# Altium PCB e-puck3-camera-4L.PcbDoc
Units mm, origin at the board's own origin, x right, y up, seen from the top; angles counter-clockwise.
Board outline 8 x 65 mm, 4 copper layers (Top Layer, INternal layer 1, INternal layer 2, Bottom Layer), stack 0.381 mm thick; 8 components, 29 nets, 119 pads, 90 vias.
Unrouted connection lines stored in the file: 1.
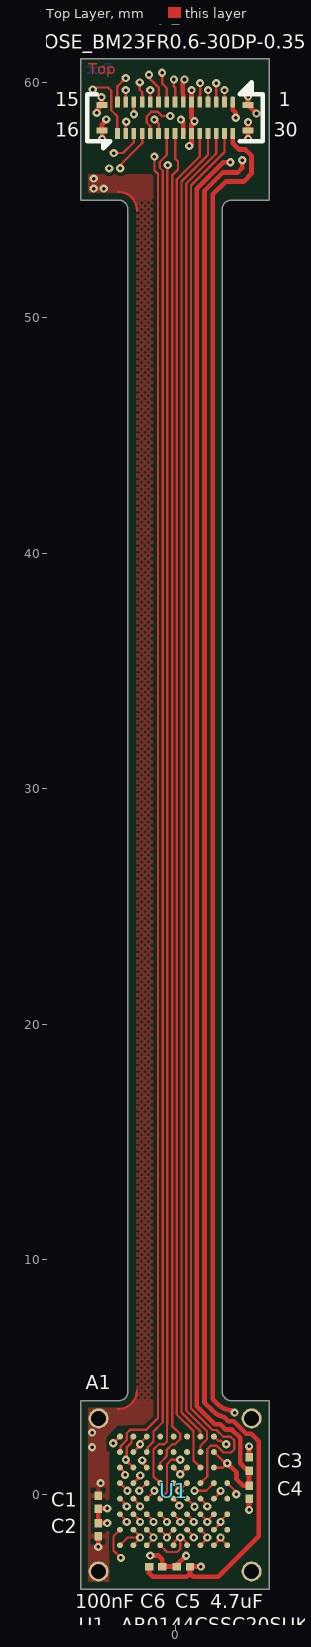
[diagram p0: Top Layer view]
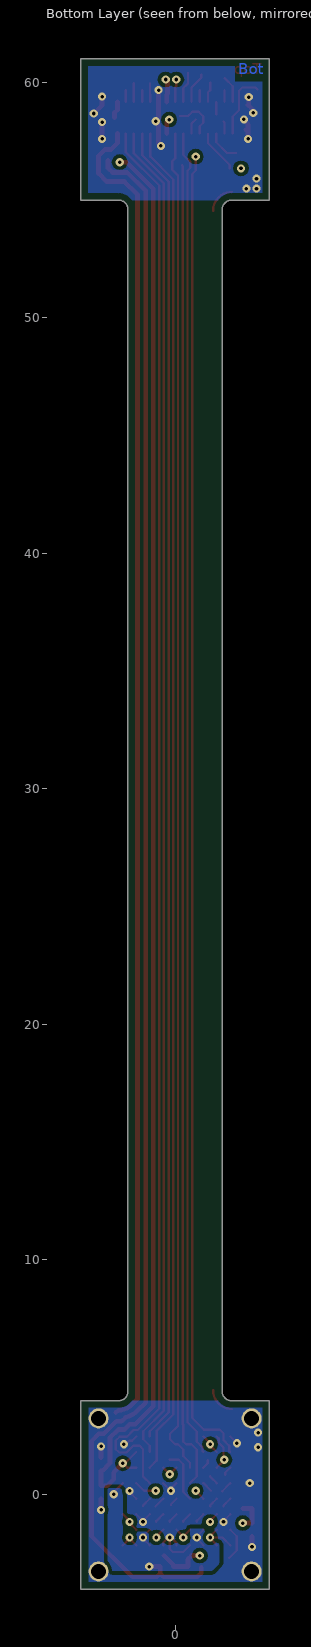
[diagram p1: Bottom Layer view, seen from below]
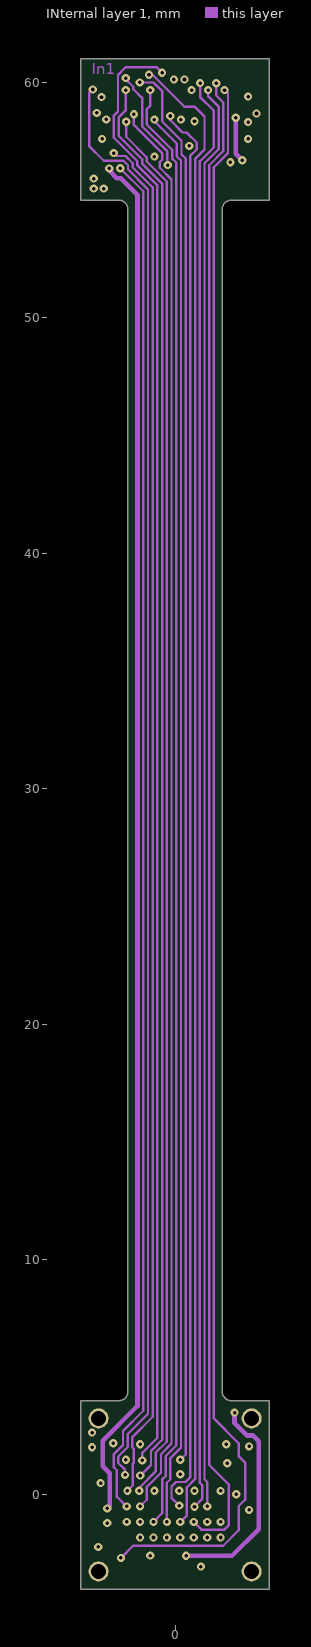
[diagram p2: INternal layer 1]
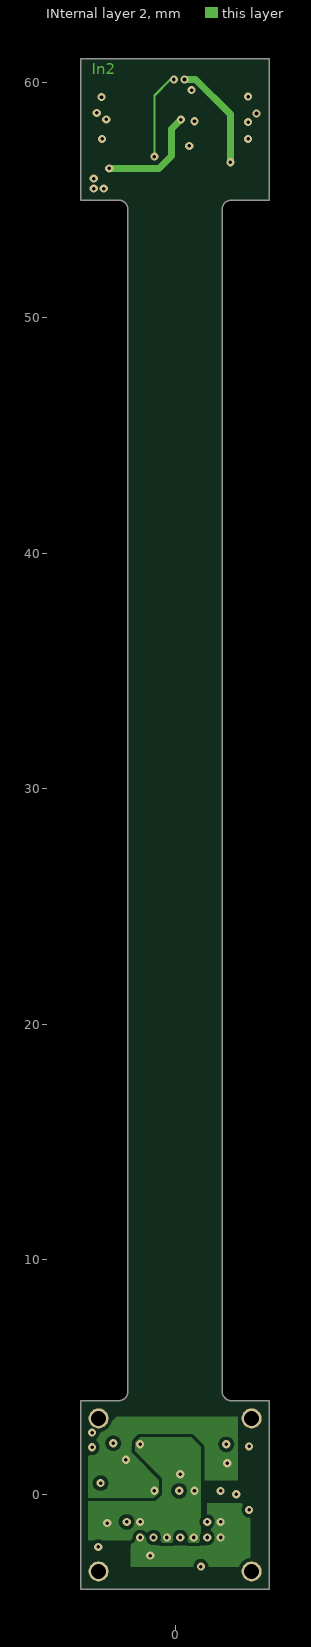
[diagram p3: INternal layer 2]

## Layer stack, top to bottom
Top Solder: solder mask 0.012, FC-001, Dk 4
Top Solder: solder mask 0.02, Solder Resist, Dk 3.5
Top Layer: signal copper 0.018
Adhesive + PI + Adhesive: prepreg 0.051, PI, Dk 4.1
INternal layer 1: signal copper 0.018
FR4 prepeg1: prepreg 0.078, Prepeg, Dk 4.1
INternal layer 2: signal copper 0.018
FR4 prepeg2: prepreg 0.18, Prepeg, Dk 4.1
Bottom Layer: signal copper 0.018
Bottom Solder: solder mask 0.012, FC-001, Dk 4
Bottom Solder: solder mask 0.02, Solder Resist, Dk 3.5

## Board outline
-4,4 -2.4,4 ccw(c-2.4,4.4) -2,4.4 -2,54.6 ccw(c-2.4,54.6) -2.4,55 -4,55 -4,61 4,61 4,55 2.4,55 ccw(c2.4,54.6) 2,54.6 2,4.4 ccw(c2.4,4.4) 2.4,4 4,4 4,-4 -4,-4
board region "Layer Stack Region 1": -2,54.6 -2.008,54.678 -2.067,54.822 -2.178,54.933 -2.322,54.992 -2.4,55 -4,55 -4,61 4,61 4,55 2.4,55 2.322,54.992 2.178,54.933 2.067,54.822 2.008,54.678 2,54.6
board region "Layer Stack Region 1": -2,4.4 -2,54.6 2,54.6 2,4.4
board region "Layer Stack Region 1": 2,4.4 2.008,4.322 2.067,4.178 2.178,4.067 2.322,4.008 2.4,4 4,4 4,-4 -4,-4 -4,4 -2.4,4 -2.322,4.008 -2.178,4.067 -2.067,4.178 -2.008,4.322 -2,4.4

## Design rules (kind name [scope] priority, off if disabled: settings)
AcuteAngle [All] p1 off: minimum=8.80000000000000E+0001 checktracksonly=FALSE
BoardOutlineClearance BoardOutlineClearance_Overlay [(OnLayer('Top Overlay'))] p1: gap=0 ignorepadtopadclearanceinfootprint=FALSE
BoardOutlineClearance [Not (OnLayer('TopCourtyard') or OnLayer('TopOverlay'))] p2: gap=0.3 ignorepadtopadclearanceinfootprint=FALSE except(0: Arc-SplitContinuation Track-SplitContinuation SMDPad-SplitContinuation THPad-SplitContinuation Via-SplitContinuation Fill-SplitContinuation Poly-SplitContinuation Region-SplitContinuation Text-SplitContinuation)
Clearance Clearance_Normal_Polygon [InPolygon] p1: gap=0.15 ignorepadtopadclearanceinfootprint=FALSE
Clearance Clearance_Normal [All] p2: gap=0.1 ignorepadtopadclearanceinfootprint=FALSE
ComponentClearance [All] p1: gap=0.2 collisioncheckmode=3 verticalgap=0.2 showdistances=FALSE
FabricationTestPointUsage TestPointUsage [All] p1: valid=0 allowmultiple=FALSE
FabricationTestpoint Testpoint [All] p1: side=3 testpointundercomponent=TRUE minsize=1.016 maxsize=2.54 preferedsize=1.524 minholesize=0 maxholesize=1.016 preferedholesize=0.813 testpointgrid=0.025 allowsidetop=TRUE allowsidebottom=TRUE usegrid=TRUE gridtolerance=0
Height [All] p1 off: minheight=0 maxheight=25.4 prefheight=12.7
HoleSize [All] p1: absolutevalues=TRUE maxlimit=6 minlimit=0.15 maxpercent=80.000 minpercent=20.000
MinimumAnnularRing [All] p1: minimumring=0.1
MinimumSolderMaskSliver [All] p1: minsoldermaskwidth=0.25
PlaneClearance [All] p1: clearance=0.4
PlaneConnect [All] p1: planeconnectstyle=Relief reliefexpansion=0.508 reliefentries=4 reliefconductorwidth=0.2 reliefairgap=0.15
PolygonConnect PolygonConnect_Via [IsVia OR IsPad] p1: connectstyle=Direct reliefconductorwidth=0.254 reliefentries=4 polygonreliefangle="90 Angle" airgapwidth=0.254
PolygonConnect [All] p2: connectstyle=Relief reliefconductorwidth=0.2 reliefentries=4 polygonreliefangle="90 Angle" airgapwidth=0.15
RoutingCorners [All] p1: cornerstyle=45-Degree minsetback=1 maxsetback=2.54
RoutingVias [All] p1: holewidth=0.3 width=0.6 viastyle="Through Hole" minholewidth=0.15 minwidth=0.35 maxholewidth=1 maxwidth=4
SMDToCorner [All] p1 off: distance=78740
SMDToPlane [All] p1 off: distance=118110
SilkToSilkClearance [All] p1: silktosilkclearance=0.2
SilkToSolderMaskClearance SilkscreenOverComponentPads [IsPad] p1: minsilkscreentomaskgap=0.2 clearancetoexposedcopper=TRUE
SolderMaskExpansion SolderMaskExpansion_Via [isVia] p1: expansion=-5 istentingtop=FALSE
SolderMaskExpansion [All] p2: expansion=0.03 istentingtop=FALSE
ViasUnderSMD [All] p1: allowed=FALSE
Width [All] p1: maxlimit=5 minlimit=0.1 preferedwidth=0.254 toplayer_prefwidth=0.1 bottomlayer_prefwidth=0.1 minimp=50.000000 maximp=50.000000 favimp=50.000000
19 further rules are at their usual default settings.

## Classes and differential pairs
net class HighFreq: D0 D1 D2 D3 D4 D5 D6 D7 D8 D9 D10 D11 HSYNC MCLK PIXCLK VSYNC
net class D[0..11]: D0 D1 D2 D3 D4 D5 D6 D7 D8 D9 D10 D11
net class DigitalPowers: D1V2 D3V0 DGND
net class AnalogPowers: A3V0 AGND

## Components (designator, comment, footprint, x,y, rotation, side; value= is the part's Value field where it differs from the comment)
C1 "4.7uF" CAPC0201(0603)33_L -3.267,-0.306 r90 top
C2 "100nF" CAPC0201(0603)33_L -3.267,-1.476 r270 top
C3 "4.7uF" CAPC0201(0603)33_L 3.143,1.312 r90 top
C4 "100nF" CAPC0201(0603)33_L 3.143,0.108 r270 top
C5 "4.7uF" CAPC0201(0603)33_L 0.354,-3.044 r0 top
C6 "100nF" CAPC0201(0603)33_L -0.827,-3.044 r180 top
P1 "HIROSE_BM23FR0.6-30DP-0.35V" HIROSE_BM23FR0.6-30DP-0.35V 0,58.5 r270 top
U1 "AR0144CSSC20SUKA0" ONSEMI-ODCSP69_570BBV -0.062,0.171 r0 top locked

## Footprints (in the part's own frame and the unit in brackets; to place one, negate y for a bottom-side part, rotate by r counter-clockwise, add the part's x,y. Pads: shape width x height; smd on the part's side, far side on the other; paste and mask are expansions set on the pad)
CAPC0201(0603)33_L [mm] "Chip Capacitor, Body 0.6x0.3mm, Height 0.33mm, IPC High Density"
  rect 0.36x0.32 smd: 1(-0.28,0) 2(0.28,0)
  body extent -0.32,-0.17 0.32,0.17, height 0.33
HIROSE_BM23FR0.6-30DP-0.35V [mm] "Hirose header BM23FR0.6 Serie, 30 leads, Plug Vertical SMT"
  rrect50% 0.46x0.2 smd mask+0.05: 1(-0.67,2.45)
  rect 0.46x0.2 smd mask+0.05: 2(-0.67,2.1) 3(-0.67,1.75) 4(-0.67,1.4) 5(-0.67,1.05) 6(-0.67,0.7) 7(-0.67,0.35) 8(-0.67,0) 9(-0.67,-0.35) 10(-0.67,-0.7) 11(-0.67,-1.05) 12(-0.67,-1.4) 13(-0.67,-1.75) 14(-0.67,-2.1) 15(-0.67,-2.45) 16(0.67,-2.45) 17(0.67,-2.1) 18(0.67,-1.75) 19(0.67,-1.4) 20(0.67,-1.05) 21(0.67,-0.7) 22(0.67,-0.35) 23(0.67,0) 24(0.67,0.35) 25(0.67,0.7) 26(0.67,1.05) 27(0.67,1.4) 28(0.67,1.75) 29(0.67,2.1) 30(0.67,2.45)
  rect 0.26x0.47 smd mask+0.05: P1(-0.54,3.1) P1(0.54,3.1) P2(-0.54,-3.1) P2(0.54,-3.1)
  silkscreen extent -1.5,-3.72 1.3,3.72, body extent -0.75,-3.48 0.75,3.47, height 0.52
ONSEMI-ODCSP69_570BBV [mm] "ODCSP69 5.545x5.565, CASE 570BV, ISSUE B"
  oct 0.25x0.25 smd mask+0.05: A1(-2.28,2.31)
  round 0.25 smd mask+0.05: A2(-1.71,2.31) A3(-1.14,2.31) A4(-0.57,2.31) A5(0,2.31) A6(0.57,2.31) A7(1.14,2.31) A8(1.71,2.31) B1(-2.28,1.65) B2(-1.71,1.65) B3(-1.14,1.65) B4(-0.57,1.65) B5(0,1.65) B6(0.57,1.65) B7(1.14,1.65) B8(1.71,1.65) C1(-2.28,0.99) C2(-1.71,0.99) C3(-1.14,0.99) C4(-0.57,0.99) C5(0,0.99) C6(0.57,0.99) C7(1.14,0.99) C8(1.71,0.99) D1(-2.28,0.33) D2(-1.71,0.33) D3(-1.14,0.33) D4(-0.57,0.33) D5(0,0.33) D6(0.57,0.33) D7(1.14,0.33) D8(1.71,0.33) D9(2.28,0.33) E1(-2.28,-0.33) E2(-1.71,-0.33) E3(-1.14,-0.33) E4(-0.57,-0.33) E5(0,-0.33) E6(0.57,-0.33) E7(1.14,-0.33) E8(1.71,-0.33) E9(2.28,-0.33) F1(-2.28,-0.99) F2(-1.71,-0.99) F3(-1.14,-0.99) F4(-0.57,-0.99) F5(0,-0.99) F6(0.57,-0.99) F7(1.14,-0.99) F8(1.71,-0.99) F9(2.28,-0.99) G1(-2.28,-1.65) G2(-1.71,-1.65) G3(-1.14,-1.65) G4(-0.57,-1.65) G5(0,-1.65) G6(0.57,-1.65) G7(1.14,-1.65) G8(1.71,-1.65) G9(2.28,-1.65) H1(-2.28,-2.31) H2(-1.71,-2.31) H3(-1.14,-2.31) H4(-0.57,-2.31) H5(0,-2.31) H6(0.57,-2.31) H7(1.14,-2.31) H8(1.71,-2.31) H9(2.28,-2.31)
  body extent -2.77,-2.78 2.77,2.78, height 0.77

## Part data
C1 C3 C5: library part "TBD Capacitor[[/\]]0201[[/\]]1", "Capacitor TBD 0201", Case/Package=0201, Case Code (Metric)=0603, Currentie=CHF, Dielectric=X5R, Manufacturer=Murata, Manufacturer Part Number=GRM035R60J475ME15D, Max Operating Temperature=85°C, Min Operating Temperature=-55°C, Supplier Part Number 1=490-13230-1-ND, Tolerance=20%, Voltage Rating=6.3V, Capacitance=4.7uF, Case Code (Imperial)=0201, ComponentLink1Description=http://search.murata.co.jp/Ceramy/image/img/A01X/G101/ENG/GRM035R60J475ME15-01.pdf?src-supplier=Digi-Key, ComponentLink1URL=http://search.murata.co.jp/Ceramy/image/img/A01X/G101/ENG/GRM035R60J475ME15-01.pdf?src-supplier=Digi-Key, DateLastUpdate="2018-10-19 / 8:59:52 AM", Footprint Acort=0201, Length=0.024inch, Mount="Surface Mount", Packaging="Tape and Reel", Preference=1, Pricing 1="1=0.44000, 10=0.30700, 100=0.18420, 500=0.13818, 1000=0.11668, 2500=0.11054, 5000=0.10440 (USD)", ROHS=True, Size=0201, Stock 1=1746304, Supplier 1=Digi-Key, Thickness=0.022inch, Voltage Rating (DC)=6.3V, Width=0.012inch
C2 C4 C6: library part "TBD Capacitor[[/\]]0201[[/\]]1", "Capacitor TBD 0201", Currentie=CHF, DateLastUpdate="2018-10-19 / 8:59:52 AM", Footprint Acort=0201, Preference=1, ROHS=True, Size=0201
P1: library part HIROSE_BM23FR0.6-30DP-0.35V[[/\]]1, "2 x 15 Hirose header BM23FR0.6 Serie, 0.35 pitch, SMD, Mate at 0.6mm with receptacle, 0.3A signal contacts", Currentie=CHF, Manufacturer=Hirose, Manufacturer Nr=BM23FR0.6-30DP-0.35V, ComponentLink1Description="Supplier link", ComponentLink1URL=https://www.hirose.com/product/series/BM23FR?lang=en, DateLastUpdate="2019-09-24 / 11:10:53 AM", Footprint Acort=ToDefine, Orientation=Vertical, Preference=1, Price_1=1.03, Quant_1=1, ROHS=True, Supplier=Mouser, Supplier Nr=798-3FR0630DP035V895, Type=SMD
U1: library part AR0144CS[[/\]]1, "AR0144CS 1/4-inch 1.0 Mp CMOS Digital Image Sensor with Global Shutter", Currentie=CHF, Manufacturer=OnSemiconductor, Manufacturer Nr=ToDefine, ComponentLink1Description="OnSemiconductor link", ComponentLink1URL=https://www.onsemi.com/PowerSolutions/search.do?searchType=others&query=AR0144, DateLastUpdate="2019-09-20 / 2:14:32 PM", Footprint Acort=ToDefine, Preference=1, ROHS=True, Size=SOIC16, Supplier=Farnell, Supplier Nr=ToDefine

## Free pads (board coordinates)
  round 0.85 hole 0.65 mask+0.05: H11(-3.25,-3.25) H11(-3.25,3.25) H11(3.25,-3.25) H11(3.25,3.25)

## Via types
v1: diameter 0.35/0.35/0.35/0.35 (per signal layer), hole 0.15, Top Layer to Bottom Layer, tented both sides, 51 vias
v2: diameter 0.35, hole 0.15, Top Layer to INternal layer 1, tented both sides, 39 vias

## Nets (pads, with @x,y where several pads share a name; then routed paths per layer and width w, separated by ;. In a path a pad name is that pad's centre, name@x,y a point inside that pad or via, vN(x,y) a via of type N, cw(c..) or ccw(c..) an arc to the next point about the centre after c; other vN are vias at no path point)
/OE: P1.29 U1.D7 | length 60.5
  Top Layer w0.1: U1.D7 1.363,0.786 1.363,1.944 1.515,2.096 1.762,2.096 2.058,1.8 2.375,1.8 2.518,1.943 2.518,2.307 2.35,2.475 2.043,2.475 1.762,2.756 1.587,2.756 0.674,3.669 0.674,55.624 2.1,57.05 P1.29
/RST: P1.2 U1.G1 | length 69.6
  Top Layer w0.1: U1.G1 -2.617,-1.754 -2.617,-2.36 v2(-2.302,-2.675) ; P1.2 v2(2.1,59.675)
  INternal layer 1 w0.1: v2(-2.302,-2.675) -1.784,-2.157 2.044,-2.157 2.7,-1.502 2.7,-0.484 2.975,-0.209 2.975,1.374 2.7,1.649 2.7,2.196 1.65,3.246 1.65,56.4 2.25,57 2.25,59.525 v2(2.1,59.675)
A3V0: C5.1 C6.1 P1.30 U1.F9 U1.G2 U1.G8 U1.H1 U1.H2 U1.H8 U1.H9 | length 71.2
  Top Layer w0.1: U1.H1 -2.012,-1.809 v1(-1.487,-1.809) U1.H2 ; U1.G2 v1@-1.487,-1.764 ; U1.H8 1.933,-1.854 U1.H9 ; U1.G8 v1@1.933,-1.194 ; v1(1.933,-1.149) 1.933,-1.104 U1.F9
  Top Layer w0.2: v1(-1.05,-2.575) -0.7,-2.575 -0.547,-2.728 C6.1 C5.1 0.074,-2.976 v2(0.468,-2.582) ; P1.30 2.45,57.425 2.725,57.15 2.99,57.15 3.25,56.89 3.25,56.133 2.908,55.791 2.15,55.791 1.6,55.241 1.6,4.069 1.834,3.834 ccw(c2.4,4.4) 2.4,3.6 v2(2.525,3.5) v2@2.525,3.504
  INternal layer 1 w0.2: v2(0.468,-2.582) 2.418,-2.582 3.55,-1.45 3.55,2.278 3.303,2.525 3.05,2.525 2.525,3.05 v2(2.525,3.5)
  other v1: 1.933,-1.809
ADDR: P1.28 U1.B7 | length 57
  Top Layer w0.1: U1.B7 1.078,2.091 1.353,2.366 1.353,2.707 0.474,3.587 0.474,55.708 1.75,56.984 P1.28
AGND: C5.2 C6.2 P1.1 U1.D9 U1.G3 U1.G7 U1.H3 U1.H7 | length 72.3
  Top Layer w0.1: U1.H3 v1@-0.917,-1.854 ; U1.G3 v1@-0.917,-1.764 ; U1.H7 1.363,-1.854 v1(1.363,-1.809) 1.363,-1.764 U1.G7 ; U1.D9 2.6,0.119 v1@2.6,0.074
  Top Layer w0.2: C6.2@-1.107,-3.073 -1.107,-3.318 -0.95,-3.475 0.497,-3.475 0.634,-3.338 ; v1(1.1,-3.044) C5.2 0.634,-3.338 ; P1.1 2.45,58.83 2.575,58.705 v2(2.575,58.5) ; v2(2.85,56.7) 2.85,56.368 2.656,56.175 2.034,56.175 1.25,55.391 1.25,3.924 1.587,3.587 ccw(c2.4,4.4) 2.102,3.289 2.267,3.125 2.491,3.125 3.021,2.595 3.233,2.595 3.55,2.278 3.55,-1.75 1.825,-3.475 0.771,-3.475 0.634,-3.338
  INternal layer 1 w0.2: v2(2.575,58.5) 2.575,56.975 v2(2.85,56.7)
  other v1: -0.917,-1.809 2.6,0.025
D0: P1.10 U1.F5 | length 65
  Top Layer w0.1: v2(-1.107,60.325) -1.107,60.192 -0.7,59.785 P1.10 ; U1.F5 0.223,-1.104 v2(0.223,-1.149)
  INternal layer 1 w0.1: v2(-1.107,60.325) -0.958,60.325 0.392,58.975 0.825,58.975 1.25,58.55 1.25,57.15 0.85,56.75 0.85,0.675 0.5,0.325 0.5,-0.872 v2(0.223,-1.149)
D1: P1.21 U1.F4 | length 61.4
  Top Layer w0.1: v2(-0.875,58.425) -0.7,58.25 P1.21 ; U1.F4 -0.347,-1.104 v2(-0.347,-1.149)
  INternal layer 1 w0.1: v2(-0.875,58.425) -0.875,58.351 0.075,57.401 0.075,56.858 0.25,56.683 0.25,2.014 -0.2,1.564 -0.2,0.664 -0.35,0.514 -0.35,-1.146 v2(-0.347,-1.149)
D1V2: C1.1 C2.1 P1.24 U1.A3 U1.B2 U1.C5 U1.C6 U1.D8 U1.F2 U1.G4 U1.G5 U1.G6 | length 69.2
  Top Layer w0.1: U1.F2 -1.487,-1.104 v1(-1.487,-1.149) ; U1.B2 -1.487,2.106 v1(-1.487,2.151) ; v1@-1.487,2.196 U1.A3 ; U1.G4 -0.347,-1.764 U1.G5 ; U1.C5 v1(0.223,0.876) U1.C6 ; U1.G6 v1@0.816,-1.786 ; v1(0.825,0.175) 1.322,0.175 U1.D8
  Top Layer w0.2: C1.1 C2.1 v1(-2.878,-1.196) ; C1.1@-3.267,-0.575 v2(-2.878,-0.575) ; v1(0.25,58.425) 0.35,58.325 P1.24
  INternal layer 1 w0.2: v2(-2.878,-0.575) -2.775,-0.472 -2.775,0.913 -3.075,1.213 -3.075,2.303 -1.6,3.778 -1.6,55.233 -2.301,55.934 -2.47,55.934 -2.8,56.264 v1(-2.8,56.35)
  INternal layer 2 w0.3: v1(-2.8,56.35) -0.678,56.35 -0.15,56.878 -0.15,58.025 v1(0.25,58.425)
  other v1: -0.347,-1.809 0.793,-1.809
D2: P1.11 U1.F3 | length 62.8
  Top Layer w0.1: U1.F3 -0.917,-1.104 v2(-0.917,-1.149) ; P1.11 v2(-1.05,59.675)
  INternal layer 1 w0.1: v2(-1.05,59.675) -1.05,59.024 -1.2,58.874 -1.2,58.22 -0.125,57.145 -0.125,56.775 0.05,56.6 0.05,2.097 -0.4,1.647 -0.4,0.8 -0.55,0.65 -0.55,-0.782 v2(-0.917,-1.149)
D3: P1.20 U1.E5 | length 62.7
  Top Layer w0.1: P1.20 -1.05,58.14 -1.2,58.29 -1.2,58.56 -1.01,58.75 -0.726,58.75 -0.551,58.575 v2(-0.2,58.575) ; U1.E5 0.175,-0.396 v2(0.175,-0.45)
  INternal layer 1 w0.1: v2(-0.2,58.575) -0.2,58.391 0.315,57.876 0.485,57.876 0.925,57.436 0.925,57.167 ; v2(0.175,-0.45) -0.15,-0.125 -0.15,0.36 0.041,0.551 0.44,0.551 0.65,0.761 0.65,56.891 0.925,57.166
D3V0: C3.1 C4.1 P1.7 U1.A2 U1.B8 U1.C2 U1.C8 U1.E3 | length 68.7
  Top Layer w0.1: U1.C2 -2.057,1.446 -2.057,2.018 -1.85,2.225 -1.85,2.403 U1.A2 ; U1.E3 v1@-0.917,0.126 ; U1.C8 2.034,1.161 v1(2.218,1.344) ; U1.B8 2.077,1.392 2.17,1.392 v1(2.218,1.344)
  Top Layer w0.2: P1.7 0.35,59.496 0.325,59.521 0.325,60.05 v1(0.4,60.125) ; v1(2.218,1.344) 2.609,0.953 2.609,0.666 2.887,0.388 C4.1 C3.1 3.08,1.032 2.768,1.344 2.768,2.424 2.417,2.775 2.15,2.775 1.919,3.006 1.691,3.006 0.925,3.772 0.925,55.49 2.05,56.615 v1(2.35,56.615)
  INternal layer 2 w0.3: v1(0.4,60.125) 0.875,60.125 2.35,58.65 v1(2.35,56.615)
  other v1: -0.875,0.175 -2.087,1.496
D4: P1.12 U1.E4 | length 62.9
  Top Layer w0.1: v2(-1.5,60) -1.5,59.682 -1.4,59.582 P1.12 ; U1.E4 -0.346,0.127 -0.346,1.304 -0.159,1.491 v2(0.223,1.491)
  INternal layer 1 w0.1: v2(-1.5,60) -0.915,60 -0.55,59.635 -0.55,58.35 0.275,57.525 0.275,56.941 0.45,56.766 0.45,1.718 v2(0.223,1.491)
D5: P1.19 U1.E1 | length 60.3
  Top Layer w0.1: U1.E1 -2.057,-0.444 v2(-2.057,-0.489) ; v2(-2.325,56.351) -2.325,56.496 -1.4,57.421 P1.19
  INternal layer 1 w0.1: v2(-2.325,56.351) -1.35,55.376 -1.35,3.575 -2.212,2.713 -2.212,2.116 -2.612,1.716 -2.612,1.187 -2.475,1.049 -2.475,-0.071 v2(-2.057,-0.489)
D6: P1.13 U1.E2 | length 61.4
  Top Layer w0.1: U1.E2 -1.487,-0.444 v2(-1.487,-0.489) ; v2(-1.75,58.65) P1.13
  INternal layer 1 w0.1: v2(-1.75,58.65) -1.75,58.199 -0.55,56.999 -0.55,56.715 -0.65,56.615 -0.65,56.373 -0.15,55.873 -0.15,2.18 -0.6,1.73 -0.6,0.942 -1.2,0.342 -1.2,-0.202 v2(-1.487,-0.489)
D7: P1.18 U1.D1 | length 60.1
  Top Layer w0.1: v2(-2.6,57.001) -2.206,57.001 -1.75,57.457 P1.18 ; U1.D1 v2@-2,0.159
  INternal layer 1 w0.1: v2(-2.6,57.001) -2.475,56.876 -2.108,56.876 -1.8,56.569 -1.8,56.392 -0.95,55.542 -0.95,3.319 -1.812,2.457 -1.812,2.016 -1.75,1.954 -1.75,1.374 -1.8,1.323 -1.8,0.4 v2(-2.025,0.175)
D8: P1.14 U1.D2 | length 61
  Top Layer w0.1: P1.14 v2(-2.1,59.675) ; U1.D2 v2@-1.487,0.786
  INternal layer 1 w0.1: v2(-2.1,59.675) -2.1,58.81 -2.4,58.51 -2.4,57.735 -1.4,56.735 -1.4,56.558 -0.55,55.708 -0.55,2.346 -1.025,1.871 -1.025,1.275 v2(-1.475,0.825)
D9: P1.17 U1.D3 | length 60.3
  Top Layer w0.1: P1.17 -2.1,58.302 v2(-2.075,58.326) ; v2@-1.527,0.176 U1.D3
  INternal layer 1 w0.1: v2(-2.075,58.326) -2.075,57.692 -1.2,56.817 -1.2,56.641 -0.35,55.79 -0.35,2.263 -0.825,1.788 -0.825,1 -1.525,0.3 v2(-1.525,0.175)
D10: P1.15 U1.D4 | length 62.1
  Top Layer w0.1: P1.15 -2.45,59.835 v2(-2.1,60.185) ; U1.D4 -0.917,0.786 -0.917,1.926 -0.692,2.151 -0.461,2.151 -0.346,2.266 -0.346,2.984 -0.326,3.004 -0.326,56.441 -0.309,56.459 v2(-0.309,56.491)
  INternal layer 1 w0.1: v2(-2.1,60.185) -2.1,60.14 -1.775,59.815 -1.775,59.718 -1.4,59.343 -1.4,58.138 -0.325,57.062 -0.325,56.508 v2(-0.309,56.491)
D11: P1.16 U1.C1 | length 64.3
  Top Layer w0.1: v2(-3.5,59.7) -3.415,59.785 -2.85,59.785 -2.715,59.65 -2.715,58.82 -2.45,58.555 P1.16 ; U1.C1 -2.125,0.944 v2(-2.125,0.85)
  INternal layer 1 w0.1: v2(-3.5,59.7) -3.65,59.55 -3.65,57.3 -3.026,56.676 -2.19,56.676 -2,56.486 -2,56.309 -1.15,55.459 -1.15,3.45 -2.012,2.588 -2.012,2.033 -2.412,1.633 -2.412,1.361 -2.125,1.074 v2(-2.125,0.85)
DGND: C1.2 C2.2 C3.2 C4.2 P1.6 P1.25 P1.P1 P1.P2 pad.H11 U1.A1 U1.A8 U1.D5 U1.D6 U1.E8 U1.F1 U1.F7 U1.F8 U1.H4 U1.H5 U1.H6 | length 15.9
  Top Layer w0.1: v1(-2.627,2.196) U1.A1 ; -2.415,3.645 ccw(c-2.415,4.443) -1.617,4.443 ; -2.415,55.355 cw(c-2.415,54.557) -1.617,54.557 ; U1.F1 -2.057,-1.104 v1(-2.057,-1.149) ; U1.H4 -0.346,-2.425 0.095,-2.425 0.223,-2.297 v1(0.223,-1.809) ; U1.H5 -0.062,-2.037 0.166,-1.809 v1(0.223,-1.809) ; U1.D5 0.223,0.216 U1.D6 ; U1.H6 0.508,-2.033 0.223,-1.748 v1(0.223,-1.809) ; U1.F7 1.363,-1.104 U1.F8 ; U1.E8 v1@1.933,0.126 ; U1.A8 1.822,2.307 1.933,2.307 2.09,2.15 v1(2.175,2.15)
  Top Layer w0.2: v1(-3.325,58.705) -3.325,58.817 -3.1,59.042 -3.125,59.067 v1(-3.125,59.378) ; v1(-3.267,-2.207) C2.2 ; v1(-3.099,57.602) P1.P2@-3.099,57.959 ; P1.P2@-2.999,57.99 -3.029,57.96 -3.1,57.96 -3.1,58.228 -2.925,58.403 v1(-2.925,58.428) ; v1(0.6,57.301) 0.7,57.401 P1.25 0.7,58.228 v1(0.825,58.353) 0.7,58.478 P1.6 v1(0.7,59.677) ; v1(3.1,57.601) 3.1,57.96 v1(3.1,58.319) ; v1(3.1,59.399) 3.1,59.04 v1(3.459,58.681) ; v1(3.143,-0.638) C4.2 ; C3.2 v1(3.143,2.058)
  other v1: 1.363,-1.149 0.175,0.175 1.933,0.171 -3.167,0.501 -3.523,2.021 -3.525,2.65 -3.459,55.49 -3.031,55.49 -3.459,55.918
FLASH: P1.3 U1.F6 | length 64.9
  Top Layer w0.1: U1.F6 0.793,-1.104 v2(0.793,-1.149) ; P1.3 v2(1.75,59.961)
  INternal layer 1 w0.1: v2(0.793,-1.149) 1.118,-1.474 2.101,-1.474 2.275,-1.3 2.275,0.45 1.45,1.275 1.45,56.483 2.05,57.083 2.05,59.15 1.75,59.45 v2(1.75,59.961)
HSYNC: P1.8 U1.B1 | length 60.8
  Top Layer w0.1: U1.B1 -2.302,1.861 -2.302,2.084 -2.056,2.33 -2.056,2.616 -1.897,2.775 -1.216,2.775 -0.726,3.265 -0.726,56.109 -0.875,56.258 v1(-0.875,56.85) ; v1(-0.05,60.125) -0.05,59.835 0,59.785 P1.8
  INternal layer 2 w0.1: v1(-0.875,56.85) -0.875,59.452 -0.202,60.125 v1(-0.05,60.125)
MCLK: P1.22 U1.B3 | length 56.5
  Top Layer w0.1: U1.B3 -1.162,1.861 -1.162,2.021 -0.917,2.266 -0.917,2.696 -0.526,3.087 -0.526,56.249 -0.65,56.373 -0.65,56.615 -0.35,56.915 P1.22
PIXCLK: P1.9 U1.C3 | length 63.8
  Top Layer w0.1: v2(-1.393,1.466) -1.393,1.352 U1.C3 ; v2(-0.551,60.411) -0.551,59.962 -0.35,59.76 P1.9
  INternal layer 1 w0.1: v2(-1.393,1.466) -1.393,1.785 -0.75,2.428 -0.75,55.625 -1.6,56.475 -1.6,56.652 -2.6,57.652 -2.6,58.592 -2.425,58.767 -2.425,60.319 -2.094,60.65 -0.79,60.65 v2(-0.551,60.411)
SCL: P1.26 U1.C7 | length 57.5
  Top Layer w0.1: P1.26 1.05,56.85 0.074,55.874 0.074,3.421 0.783,2.712 0.783,1.456 U1.C7
SDA: P1.5 U1.E6 | length 62.4
  Top Layer w0.1: U1.E6 v2@0.832,-0.482 ; P1.5 1.05,59.496 1.063,59.509 v2(1.063,59.974)
  INternal layer 1 w0.1: v2(0.825,-0.5) 1.15,-0.175 1.15,0.419 1.05,0.519 1.05,56.649 1.65,57.249 1.65,58.8 1.063,59.387 v2(1.063,59.974)
SHUTTER: P1.27 U1.A7 | length 56.1
  Top Layer w0.1: U1.A7 1.078,2.7 0.274,3.504 0.274,55.791 1.4,56.917 P1.27
TRIG: P1.4 U1.E7 | length 61.6
  Top Layer w0.1: U1.E7 1.363,-0.444 v2(1.363,-0.489) ; P1.4 v2(1.4,59.675)
  INternal layer 1 w0.1: v2(1.363,-0.489) 1.363,0.551 1.25,0.664 1.25,56.566 1.85,57.166 1.85,58.975 1.4,59.425 v2(1.4,59.675)
VSYNC: P1.23 U1.C4 | length 57.4
  Top Layer w0.1: U1.C4 -0.632,1.365 -0.347,1.65 -0.347,1.926 -0.122,2.151 -0.003,2.151 0.213,2.367 0.213,2.595 -0.126,2.934 -0.126,56.049 0.125,56.301 0.125,56.644 0,56.769 P1.23
pads on no net: U1.A4 U1.A5 U1.A6 U1.B4 U1.B5 U1.B6 U1.E9 U1.G9

## Polygon pours and split planes (outlines as drawn)
A3V0 on INternal layer 2 "Layer 2-A3V0" (solid, remove dead copper, pour order 16): -1.875,-3.045 -1.875,-1.925 -1.551,-1.601 -0.75,-1.601 -0.75,-2.15 1.363,-2.15 1.363,-0.35 3.203,-0.35 3.203,-3.045
D1V2 on INternal layer 2 "Bottom Layer-D1V2" (solid, remove dead copper, pour order 6): 1.088,-2.025 -0.637,-2.025 -0.637,-1.925 -3.7,-1.925 -3.7,-0.279 -0.833,-0.279 -0.537,0.012 -0.537,0.7 -1.694,1.857 -1.687,2.246 -1.487,2.446 0.688,2.446 1.088,2.046
D3V0 on INternal layer 2 "Bottom Layer-D3V0" (solid, remove dead copper, pour order 8): 1.213,0.921 1.213,2.096 0.738,2.571 -1.53,2.571 -1.812,2.289 -1.812,1.796 -0.662,0.646 -0.662,0.046 -0.858,-0.15 -3.694,-0.15 -3.694,2.106 -2.479,3.321 2.663,3.321 2.663,0.625 1.21,0.625
DGND on Bottom Layer "Layer 1-DGND" (solid, remove dead copper, pour order 2): -4.137,4 -4.137,-3.704 3.677,-3.704 3.677,4
AGND on Bottom Layer "Layer 1-AGND" (solid, remove dead copper, pour order 0): -1.875,-2.025 -1.3,-1.429 -0.637,-1.429 -0.637,-2.025 1.125,-2.025 1.125,-1.575 2.22,-1.575 2.22,-0.109 2.22,0.275 2.85,0.275 2.85,-3.225 -1.57,-3.225 -1.875,-2.92
DGND on Bottom Layer "Bottom Layer-DGND" (solid, remove dead copper, pour order 22): -4,62 -4,55 4,55 4,62
DGND on Top Layer "Top Layer-DGND" (solid, remove dead copper, pour order 18): -2.95,56.1 -4,56.1 -4,55 -2.425,55.3 -2.161,55.311 -1.976,55.224 -1.769,55.026 -0.875,54.999 -0.875,56.1
DGND on Top Layer "Top Layer-DGND 1" (hatched 45Degree grid 0.2 track 0.1, pour order 14): -0.888,55.281 -1.616,55.265 -1.869,3.735 -0.888,3.735
DGND on Top Layer "Top Layer-DGND 2" (solid, remove dead copper, pour order 12): -0.875,3.339 -0.875,4 -1.8,4 cw(c-2.305,4.264) -2.225,3.7 -3.8,3.7 -3.8,-3.826 -2.8,-3.825 -2.8,1.861 -2.925,1.861 -2.925,2.456 -2.431,2.95 -1.264,2.95

## Other copper
Top Layer:
  text "Top" at -3.688,60.18 h0.8
INternal layer 1:
  text "In1" at -3.55,60.18 h0.8
INternal layer 2:
  text "In2" at -3.55,60.18 h0.8
Bottom Layer:
  text "Bot" at -2.675,60.18 h0.8

## Silkscreen, mask and mechanical layers (free items; w line width, h text height)
Top Overlay:
  text "15" at -5.1,58.8 h1
  text "1" at 4.4,58.8 h1
  text "16" at -5.1,57.5 h1
  text "30" at 4.2,57.5 h1
  text "A1" at -3.8,4.3 h1
Bottom Solder:
  text "Ý" at 3.175,59.597 h1.5
  text "E" at -0.95,59.475 h1 r45
  text "W" at 2.258,59.35 h1.5
  text "MOBOTS" at 0.235,59.301 h1 r45
  text "Rev A -DBR" at 2.55,58.85 h1 r45
  text "22.11.2019" at 3.05,58.1 h1 r45
  text "AR0144CS" at 2.5,2.975 h1.5 r35
Outline:
  the board outline again, w0.001
Never:
  lines w0.01: 2.5,0 2.5,2.264 ; 5,0 5,2.264 ; 7.5,0 7.5,2.264 ; 10,0 10,2.264 ; 12.5,0 12.5,2.264 ; 15,0 15,2.264 ; 20.05,0 0,0 ; 30,-30 ccw(c30,0) 30,30 ; 30,-25 ccw(c30,0) 30,25 ; 30,-20 ccw(c30,0) 30,20 30,0 ; 30,-15 ccw(c30,0) 30,15 ; 0,0 0,2.264 cw(c0,0) 0,-2.264 0,0
  lines w0.1: 30,-30 0,2.264 ; 30,30 0,-2.264 ; 0,-2.264 30,15 30,-15 0,2.264 ; 0,-2.264 30,20 30,25 0,-2.264 ; 0,2.264 30,-25 30,-20 0,2.264
TopBody:
  lines w0.01: -3.7,-3.7 3.7,-3.7 3.7,3.7 -3.7,3.7 -3.7,-3.7
Drill Drawing:
  text ".Legend" at -14.075,-11.575 h2

## Dimensions
-4,61 to 4,61 on Outline
-4,-4 to -4,61 on Outline

## Text inside footprints (layer, text, board x,y; h text height)
U1: TopCourtyard "Mechanical" at 0.751,0.842 h0.5; TopCourtyard "Optical" at 0.726,-0.483 h0.5